# EAGLE board au7860_9_teardown (EAGLE 7.6.0)
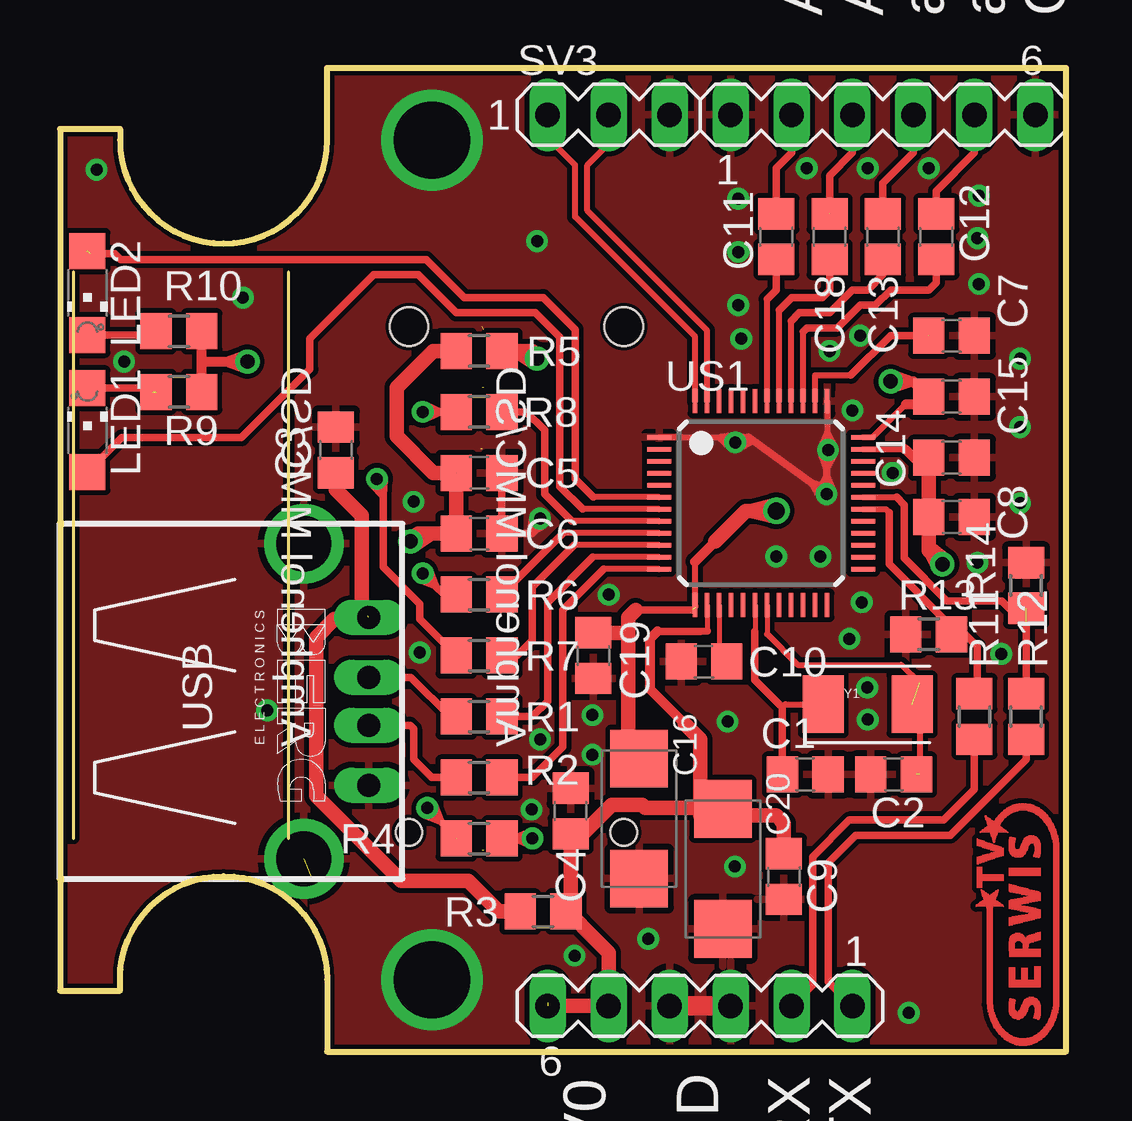
[diagram p0: board, top side]
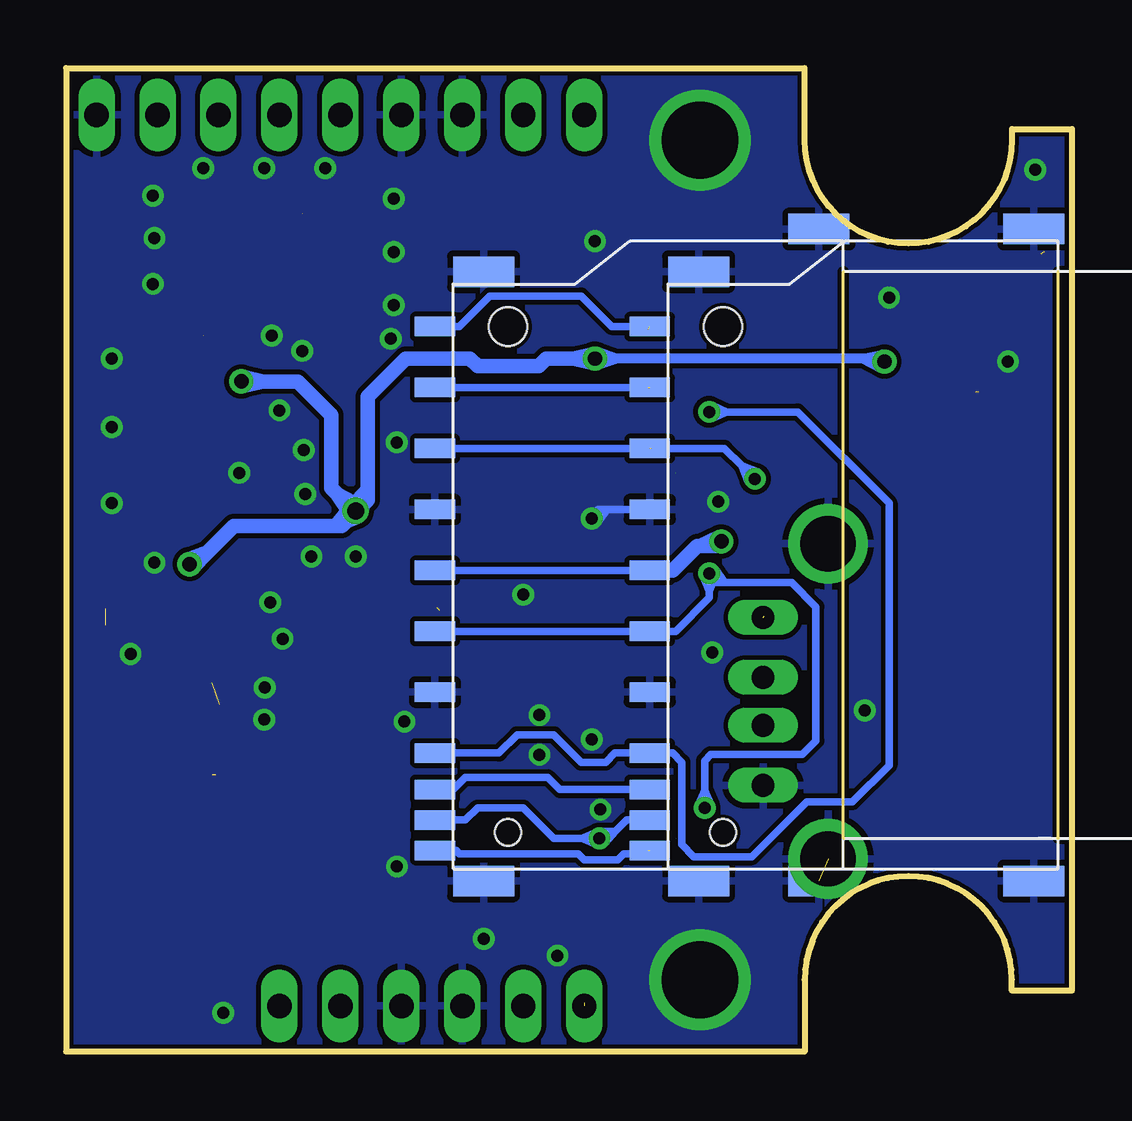
[diagram p1: board, bottom side, seen from below]

Size 41.91 x 41 mm. Coordinates in mm from the lower left corner, seen from the top.
Outline: 2.5,38 2.5,38.46 0,38.46 0,2.54 2.5,2.54 2.5,3
Outline: 2.5,38 arc180 11.13,38
Outline: 2.5,3 arc-180 11.13,3
Outline: 2.5,38 arc180 11.13,38
Outline: 11.13,38 11.13,41 41.91,41 41.91,0 11.13,0 11.13,3
Outline: 2.5,3 arc-180 11.13,3
Copper layers (1*16): Top 0.035mm / dielectric 1.5mm / Bottom 0.035mm
Design rules "default": minimum track width 0mil, minimum drill 22mil, track to track 8mil, track to pad 8mil, pad to pad 8mil, via to via 8mil, smd to smd 8mil, copper to edge 7mil, drill to drill 8mil, minimum pad ring 10mil, minimum via ring 8mil, stop-mask expansion 4mil, vias tented up to drill 23mil, thermal gap 10mil

## Footprints (pad centres in the part's own frame; a part is rotated, then mirrored left to right if it is on the bottom)
C0805 = smd 1.3 x 1.5: 1 -0.95,0; 2 0.95,0
SMC_C = smd 2.4 x 2.4: + -2.5,0; - 2.5,0
CHIPLED_1206 = smd 1.5 x 1.5: A 0,-1.75; C 0,1.75
R0805 = smd 1.3 x 1.5: 1 -0.95,0; 2 0.95,0
MA06-1 = drill 1.016 long: 1 -6.35,0; 2 -3.81,0; 3 -1.27,0; 4 1.27,0; 5 3.81,0; 6 6.35,0
MA03-1 = drill 1.016 long: 1 -2.54,0; 2 0,0; 3 2.54,0
SDCMF-10915W010 = smd 0.813 x 1.676: 1 7.366,13.462; 2 4.826,13.462; 3 2.286,13.462; 4 -0.254,13.462; 5 -2.794,13.462; 6 -5.334,13.462; 7 -7.874,13.462; 8 -9.398,13.462; 9 9.906,13.462; 10 -11.938,13.462; 11 -10.668,13.462 | smd 1.27 x 2.54: 12 12.192,11.43; 13 13.97,-2.54; 14 -13.208,-2.54; 15 -13.208,11.43 | hole 1.6: 9.906,10.414 | hole 1.1: -11.176,10.414
LQFP48-7X7 = smd 1 x 0.2: 1 -4.25,2.75; 2 -4.25,2.25; 3 -4.25,1.75; 4 -4.25,1.25; 5 -4.25,0.75; 6 -4.25,0.25; 7 -4.25,-0.25; 8 -4.25,-0.75; 9 -4.25,-1.25; 10 -4.25,-1.75; 11 -4.25,-2.25; 12 -4.25,-2.75; 25 4.25,-2.75; 26 4.25,-2.25; 27 4.25,-1.75; 28 4.25,-1.25; 29 4.25,-0.75; 30 4.25,-0.25; 31 4.25,0.25; 32 4.25,0.75; 33 4.25,1.25; 34 4.25,1.75; 35 4.25,2.25; 36 4.25,2.75 | smd 0.2 x 1: 13 -2.75,-4.25; 14 -2.25,-4.25; 15 -1.75,-4.25; 16 -1.25,-4.25; 17 -0.75,-4.25; 18 -0.25,-4.25; 19 0.25,-4.25; 20 0.75,-4.25; 21 1.25,-4.25; 22 1.75,-4.25; 23 2.25,-4.25; 24 2.75,-4.25; 37 2.75,4.25; 38 2.25,4.25; 39 1.75,4.25; 40 1.25,4.25; 41 0.75,4.25; 42 0.25,4.25; 43 -0.25,4.25; 44 -0.75,4.25; 45 -1.25,4.25; 46 -1.75,4.25; 47 -2.25,4.25; 48 -2.75,4.25
PN87520-S = drill 0.95 long: 1 -3.5,2.71; 2 -1,2.71; 3 1,2.71; 4 3.5,2.71 | drill 2.3 pad 2.9: S1 -6.57,0; S2 6.57,0
CRYSTAL-TXC-7A = smd 1.7 x 2.4: P$1 1.85,0; P$2 -1.85,0

## Placement (x,y rotation side)
C1  22p  [C0805]  31.05,11.56 180 top
C2  22p  [C0805]  34.73,11.56 0 top
C3  10u  [C0805]  11.49,25.08 90 top
C4  10u  [C0805]  21.27,10.03 90 top
C5  10u  [C0805]  17.46,24.13 0 top
C6  10u  [C0805]  17.46,21.59 0 top
C7  10u  [C0805]  37.15,29.84 0 top
C8  10u  [C0805]  37.15,22.29 0 top
C9  10u  [C0805]  30.16,7.3 270 top
C10  10u  [C0805]  26.83,16.26 180 top
C11  10u  [C0805]  29.84,33.97 270 top
C12  10u  [C0805]  36.51,33.97 270 top
C13  10u  [C0805]  34.29,33.97 270 top
C14  10u  [C0805]  37.15,24.77 0 top
C15  10u  [C0805]  37.15,27.3 0 top
C16  100u/6V niobowy  [SMC_C]  24.13,9.72 270 top
C18  10u  [C0805]  32.07,33.97 270 top
C19  10u  [C0805]  22.23,16.51 270 top
C20  100u/6V niobowy  [SMC_C]  27.62,7.62 270 top
LED1  Zielona  [CHIPLED_1206]  1.14,25.91 0 top
LED2  Czerwona  [CHIPLED_1206]  1.14,31.62 180 top
R1  100  [R0805]  17.46,13.97 0 top
R2  100  [R0805]  17.46,11.43 0 top
R3  1  [R0805]  20.13,5.84 0 top
R4  10k  [R0805]  17.46,8.89 180 top
R5  1  [R0805]  17.46,29.21 0 top
R6  100  [R0805]  17.46,19.05 0 top
R7  100  [R0805]  17.46,16.51 0 top
R8  100  [R0805]  17.46,26.67 0 top
R9  470  [R0805]  4.95,27.5 0 top
R10  470  [R0805]  4.95,30.04 0 top
R11  1  [R0805]  38.1,13.97 90 top
R12  1  [R0805]  40.26,13.97 90 top
R13  nie montowac  [R0805]  36.2,17.4 0 top
R14  nie montowac  [R0805]  40.26,19.43 90 top
SV1  Nie montowac  [MA06-1]  34.29,39.05 0 top
SV2  Nie montowac  [MA06-1]  26.67,1.91 180 top
SV3  [MA03-1]  22.86,39.05 0 top
U$1  Nie montować  [SDCMF-10915W010]  4.13,20.32 90 bottom
U$2  Nie montować  [SDCMF-10915W010]  13.08,20.32 90 bottom
US1  AU7860  [LQFP48-7X7]  29.21,22.86 0 top
USB  Nie montowac  [PN87520-S]  10.16,14.61 270 top
Y1  QSDG12M000-SJK 12MHz www.maritex.com.pl  [CRYSTAL-TXC-7A]  33.66,14.48 0 top

## Library data of the parts
C1-C16 C18-C20 R1-R14 = rcl
LED1 LED2 = led
SV1-SV3 = con-lstb; OC_FARNELL: unknown; OC_NEWARK: unknown
U$1 U$2 = kingfont_sdcmf10915w010_covek
US1 = st-microelectronics
USB = con-berg; OC_FARNELL: unknown; OC_NEWARK: unknown
Y1 = SparkFun-FreqCtrl

## Nets
+3V3: C8.1 C14.1 C15.1 C16.+ C19.1 R5.2 R9.2 R10.2 US1.13 US1.35 US1.36
+5V: C4.1 C9.1 C20.+ R3.2 SV2.5 SV2.6 US1.14
GND: C1.1 C2.1 C3.2 C4.2 C5.2 C6.2 C7.2 C8.2 C9.2 C10.2 C14.2 C15.2 C16.- C19.2 C20.- R13.1 R14.2 SV1.1 SV1.6 SV2.3 SV2.4 SV3.3 U$1.3 U$1.6 U$1.12 U$1.13 U$1.14 U$1.15 U$2.3 U$2.6 U$2.12 U$2.13 U$2.14 U$2.15 US1.1 US1.37 USB.4 USB.S1 USB.S2
N$1: C1.2 US1.18 Y1.P$2
N$2: C2.2 US1.19 Y1.P$1
N$3: R7.1 U$1.2 U$2.2
N$4: C13.2 US1.40
N$5: C12.2 US1.39
N$6: LED2.C R10.1
N$7: LED1.C R9.1
N$8: C7.1 US1.38
N$9: C13.1 SV1.4
N$10: C10.1 US1.15
N$11: C12.1 SV1.5
N$12: R4.1 U$1.11 U$2.11
N$13: R4.2 R6.1 U$1.5 U$2.5
N$14: R8.1 U$1.7 U$2.7
N$15: R11.1 SV2.2
N$16: C5.1 C6.1 R5.1 U$1.4 U$2.4
N$17: C18.2 US1.41
N$18: R11.2 R13.2 US1.30
N$19: R8.2 US1.8
N$20: R7.2 US1.10
N$21: R6.2 US1.9
N$22: R12.1 SV2.1
N$23: C3.1 R3.1 USB.1
N$24: R1.1 USB.2
N$25: R2.1 USB.3
N$26: R12.2 R14.1 US1.31
N$27: R1.2 US1.11
N$28: R2.2 US1.12
N$29: SV3.2 US1.47
N$30: SV3.1 US1.48
N$35: C11.2 US1.42
N$36: C11.1 SV1.2
N$37: C18.1 SV1.3
N$38: LED2.A US1.6
N$39: LED1.A US1.7
N$40: U$1.8 U$2.8
N$41: U$1.9 U$2.9
N$42: U$1.1 U$2.1
N$43: U$1.10 U$2.10

## Tracks (layer width: path | path; a pad name or v marks a point on that pad's centre or on a via)
+3V3  (via drill 0.6, 0.7)  (1 unrouted)
  Top 0.203: 36.2,23.81 36.2,24.13 | 35.88,27.3 C15.1
  Top 0.254: 26.46,20.43 US1.13 26.46,18.52 | US1.35 35.22,25.11 | 35.24,26.99 33.87,25.61 US1.36
  Top 0.305: 36.2,23.81 36.2,22.86 36.2,21.91 C8.1 | 35.88,27.3 35.88,27.62 36.2,27.62 | C15.1 35.88,26.98 35.88,26.99 | 26.35,18.41 24,18.41 | 22.55,17.46 C19.1
  Top 0.406: 26.46,20.43 27.3,21.27 | 35.22,25.11 36.2,24.13 | R9.2 5.9,28.77 | 5.9,28.77 R10.2 | 5.9,28.77 6.91,28.77 | 6.91,28.77 v7.81,28.77 | 35.88,27.62 35.56,27.94 35.51,27.94 | 35.51,27.94 v34.61,27.94 | 35.24,26.99 35.88,26.99 | 23.68,13.02 24.13,12.7 C16.+ | 6.91,28.77 7.71,28.48 v7.81,28.77 | 6.91,28.77 7.71,29.05 v7.81,28.77 | 35.51,27.94 34.71,28.22 v34.61,27.94 | 35.51,27.94 34.71,27.66 v34.61,27.94
  Top 0.61: R5.2 19.03,29.21 | 19.03,29.21 19.68,29.21 v19.88,28.89 | C14.1 36.2,23.81 36.2,21.02 | 36.2,21.02 36.2,20.89 v36.77,20.32 | 23.68,17.46 23.68,18.1 24,18.41 | 23.68,17.46 23.68,13.02 | 22.54,17.46 22.55,17.46 23.68,17.46 | v29.84,22.54 28.8,22.54 | 28.8,22.54 28.57,22.54 27.3,21.27 | 28.8,22.54 29.79,22.3 v29.84,22.54 | 28.8,22.54 29.79,22.78 v29.84,22.54 | 19.03,29.21 19.77,28.73 v19.88,28.89 | 19.03,29.21 19.9,29.09 v19.88,28.89 | 36.2,21.02 36.59,20.23 v36.77,20.32 | 36.2,21.02 36.89,20.48 v36.77,20.32
  Bottom 0.406: 8.7,28.89 8.06,28.89 7.87,28.7 | 8.7,28.89 18.98,28.89 | 18.98,28.89 v19.88,28.89 | 8.7,28.89 7.87,29.06 v7.81,28.77 7.95,28.5 8.7,28.89 | 18.98,28.89 19.77,28.61 v19.88,28.89 | 18.98,28.89 19.77,29.18 v19.88,28.89
  Bottom 0.61: 20.78,28.89 21.91,28.89 22.23,28.57 24.77,28.57 25.08,28.89 27.75,28.89 29.34,27.3 29.34,23.46 | 20.78,28.89 v19.88,28.89 | 33.71,27.94 32.26,27.94 30.86,26.54 30.86,23.5 30.62,23.25 | 33.71,27.94 v34.61,27.94 | v36.77,20.32 36.51,20.32 36.02,20.82 | 36.02,20.82 34.93,21.91 30.68,21.91 | 30.68,21.91 30.42,21.91 29.84,22.48 | 30.62,23.25 29.84,22.48 | 29.34,23.46 29.34,22.99 29.84,22.48 | 30.68,21.91 30.04,22.7 v29.84,22.54 | 30.68,21.91 29.75,22.32 v29.84,22.54 | 30.62,23.25 29.73,22.76 v29.84,22.54 | 30.62,23.25 30.05,22.4 v29.84,22.54 | 29.34,23.46 29.61,22.48 v29.84,22.54 | 29.34,23.46 30.03,22.71 v29.84,22.54 | 20.78,28.89 19.92,29.09 v19.88,28.89 | 20.78,28.89 19.92,28.7 v19.88,28.89 | 36.02,20.82 36.62,20.18 v36.77,20.32 | 36.02,20.82 36.84,20.5 v36.77,20.32 | 33.71,27.94 34.56,27.75 v34.61,27.94 | 33.71,27.94 34.56,28.13 v34.61,27.94
+5V  (1 unrouted)
  Top 0.203: US1.14 26.96,17.54
  Top 0.305: 26.96,17.54 26.67,17.53 24.89,17.53
  Top 0.406: 24.89,17.53 24.57,17.21 24.57,15.11 26.04,13.65 | 26.67,9.84 27.69,9.84 27.69,10.12 | C20.+ 27.69,10.12 | 27.69,10.12 27.69,10.16
  Top 0.61: 20,1.91 SV2.6 SV2.5 22.86,4.13 22.22,4.76 21.27,5.71 | 21.27,5.71 C4.1 21.78,9.08 22.99,10.29 24.26,10.29 24.38,10.16 27.58,10.16 C20.+ | C9.1 30.16,9.53 29.84,9.84 26.67,9.84 26.67,13.02 26.04,13.65 | 20.19,2.16 20.32,2.03 | 21.27,5.71 20.83,6.16 20.83,6.22 R3.2
GND  (via drill 0.5, 3.2)  (1 unrouted)
  Top 0.254: US1.37 31.96,25.83 | 31.96,25.83 31.96,24.66 | US1.1 27.41,25.61 | 27.41,25.61 28.68,25.61 | 31.96,25.83 31.7,25.21 v32,25.08 32.29,25.24 31.96,25.83 | 27.41,25.61 27.91,25.16 v28.13,25.4 28.08,25.72 27.41,25.61
  Top 0.305: C5.2 C6.2 19.6,21.59 | v20,22.23 20,21.91 19.68,21.59 19.6,21.59 | 31.96,24.66 31.96,24.33 | 31.96,24.33 v31.94,23.24 | 28.68,25.61 v31.94,23.24 | 19.6,21.59 20.17,21.98 v20,22.23 | 19.6,21.59 19.7,22.27 v20,22.23 | v31.94,23.24 31.67,23.36 31.95,23.99 32.22,23.36 v31.94,23.24 | v31.94,23.24 31.68,23.09 31.33,23.68 32.01,23.54 v31.94,23.24 | 31.96,24.33 32.27,24.94 v32,25.08 31.72,24.98 31.96,24.33 | 28.88,25.47 28.23,25.68 v28.13,25.4 28.28,25.14 28.88,25.47
  Top 0.813: SV2.3 SV2.4
  Bottom 0.305: U$1.3 19.36,22.61 | 19.36,22.61 19.75,22.61 v20,22.23 | 19.36,22.61 19.76,22.05 v20,22.23 | 19.36,22.61 20.04,22.52 v20,22.23
  other vias: 36.2,36.83 33.66,36.83 31.11,36.83 32.89,17.21 15.5,3 15.5,38 32.07,29.21 33.34,29.84 28.26,35.56 28.26,33.34 34.69,24.13 14.73,22.92 19.88,33.78 24.51,4.7 31.69,20.64 38.23,33.91 2.67,28.77 40.01,28.89 40.01,26.04 40.01,22.86 33.02,26.73 14.99,16.64 29.84,20.64 33.66,13.84 20,13.02 38.29,35.69 28.26,31.11 38.29,32 22.86,19.05 28.12,7.72 39.22,16.57 21.44,4 22.19,14.03 27.81,13.76 7.62,31.43 38.23,20.38 8.64,14.22 1.52,36.77 33.64,15.18 22.19,12.38 19.65,10.09 35.36,1.62 33.4,18.73 28.38,29.72
  pour Bottom: -1.27,41.91 43.18,41.91 43.18,-1.27 -1.27,-1.27
  pour Top: -1.27,41.91 43.18,41.91 43.18,-1.27 -1.27,-1.27
N$1
  Top 0.203: US1.18 28.96,17.53
  Top 0.254: 30.1,14.35 30.23,14.48 Y1.P$2
  Top 0.305: C1.2 30.1,14.35 29.84,14.61 28.96,15.49 28.96,17.53
N$2  (2 unrouted)
  Top 0.203: US1.19 29.46,17.4
  Top 0.254: 29.46,17.4 30.73,16.13 35.05,16.13 35.81,15.37 35.81,11.56
N$3  (via drill 0.5)  (1 unrouted)
  Top 0.305: R7.1 14.99,18.04 14.99,18.67 13.46,20.19 13.46,23.17 | 13.46,23.17 13.46,23.24 13.21,23.5 v13.21,23.88 | 13.46,23.17 13.51,23.86 v13.21,23.88 | 13.46,23.17 12.99,23.67 v13.21,23.88
  Bottom 0.305: v13.21,23.88 13.74,24.41 | 13.74,24.41 14.48,25.15 17.53,25.15 | U$2.2 U$1.2 | 13.74,24.41 13.1,24.16 v13.21,23.88 | 13.74,24.41 13.49,23.77 v13.21,23.88
N$4
  Top 0.254: US1.40 30.46,30.46
  Top 0.305: 30.46,30.46 30.8,30.8 32.07,30.8 33.02,31.75 33.66,31.75 34.29,32.38 C13.2
N$5
  Top 0.254: US1.39 30.96,30.01
  Top 0.305: 30.96,30.01 31.11,30.16 32.38,30.16 33.34,31.11 33.97,31.11 34.61,31.75 36.2,31.75 36.51,32.07 C12.2
N$6
  Top 0.305: LED2.C 4.48,29.87 R10.1
N$7  (1 unrouted)
  Top 0.305: LED1.C 3.52,27.66 3.68,27.5 3.87,27.5
N$8  (1 unrouted)
  Top 0.254: US1.38 31.46,28.19 32.96,28.19
  Top 0.305: 32.96,28.19 34.61,29.84 C7.1
N$9
  Top 0.305: SV1.4 35.56,37.47 34.29,36.2 C13.1
N$10
  Top 0.203: US1.15 27.46,16.51
  Top 0.305: 27.46,16.51 C10.1
N$11
  Top 0.305: SV1.5 38.1,37.47 36.51,35.88 C12.1
N$12  (via drill 0.5)
  Top 0.305: R4.1 18.93,8.89 | 18.93,8.89 v19.68,8.89 | 18.93,8.89 19.56,8.61 v19.68,8.89 | 18.93,8.89 19.56,9.17 v19.68,8.89
  Bottom 0.305: U$1.11 18.54,9.65 19,9.19 | 19,9.19 19.56,8.64 v19.68,8.89 | U$2.11 25.27,9.65 24.77,10.16 22.86,10.16 21.59,8.89 20.43,8.89 | 20.43,8.89 19.94,8.89 19.68,8.64 | 19,9.19 19.46,8.69 v19.68,8.89 | 19,9.19 19.69,9.19 v19.68,8.89 | 20.43,8.89 19.81,9.17 v19.68,8.89 | 20.43,8.89 19.81,8.61 v19.68,8.89
N$13  (via drill 0.5)  (1 unrouted)
  Top 0.305: v15.3,10.16 15.83,9.63 | 15.83,9.63 16.57,8.89 R4.2 | R6.1 16,19.05 15.64,19.41 | 15.64,19.41 v15.11,19.94 | 15.83,9.63 15.58,10.27 v15.3,10.16 | 15.83,9.63 15.19,9.88 v15.3,10.16 | 15.64,19.41 15.39,20.05 v15.11,19.94 | 15.64,19.41 15,19.66 v15.11,19.94
  Bottom 0.305: v15.3,10.16 15.3,10.91 | 15.3,10.91 15.3,12.13 15.05,12.38 11.24,12.38 10.67,12.95 10.67,18.54 11.68,19.56 14.47,19.56 | 14.47,19.56 14.99,19.56 v15.11,19.94 | v15.11,19.94 15.11,19.19 | 15.11,19.19 15.11,18.92 16.51,17.53 U$1.5 U$2.5 | 15.3,10.91 15.03,10.28 v15.3,10.16 | 15.3,10.91 15.58,10.28 v15.3,10.16 | 14.47,19.56 15.15,19.64 v15.11,19.94 | 14.47,19.56 14.87,20.11 v15.11,19.94 | 15.11,19.19 15.39,19.82 v15.11,19.94 | 15.11,19.19 14.84,19.82 v15.11,19.94
N$14  (via drill 0.5)
  Top 0.305: R8.1 15.86,26.67 | 15.86,26.67 v15.11,26.67 | 15.86,26.67 15.23,26.95 v15.11,26.67 | 15.86,26.67 15.23,26.39 v15.11,26.67
  Bottom 0.305: U$2.7 23.88,12.45 23.11,13.21 21.59,13.21 20.45,12.06 19.43,12.06 19.05,12.45 U$1.7 16.64,12.45 16.26,12.06 16.26,8.64 15.75,8.13 13.34,8.13 11.05,10.41 9.14,10.41 7.62,11.94 7.62,22.86 11.43,26.67 14.36,26.67 | v15.11,26.67 14.36,26.67 | 14.36,26.67 14.99,26.39 v15.11,26.67 | 14.36,26.67 14.99,26.95 v15.11,26.67
N$15
  Top 0.305: SV2.2 31.37,2.79 31.37,8.13 32.89,9.65 36.83,9.65 38.1,10.92 R11.1
N$16  (via drill 0.6)  (1 unrouted)
  Top 0.305: C6.1
  Top 0.61: v14.61,21.27 14.92,21.59 15.45,21.59 | 15.45,21.59 C6.1 | R5.1 15.56,29.21 14.03,27.69 14.03,25.65 15.56,24.13 C5.1 | C5.1 C6.1 | 15.45,21.59 14.58,21.47 v14.61,21.27 | 15.45,21.59 14.71,21.11 v14.61,21.27
  Bottom 0.305: U$2.4 U$1.4 17.53,20.07
  Bottom 0.61: v14.61,21.27 14.8,21.27 14.99,21.08 15.48,21.08 | 15.48,21.08 15.62,21.08 16.64,20.07 17.53,20.07 | 15.48,21.08 14.69,21.45 v14.61,21.27 | 15.48,21.08 14.61,21.07 v14.61,21.27
N$17
  Top 0.254: US1.41 29.96,30.91
  Top 0.305: 29.96,30.91 30.48,31.43 31.75,31.43 32.07,31.75 C18.2
N$18
  Top 0.203: 36.96,17.91 36.89,17.65 R13.2
  Top 0.254: US1.30 34.41,22.61 34.54,22.48
  Top 0.305: 34.54,22.48 34.54,20.32 36.96,17.91 | R13.2 37.72,17.4 38.23,16.89 38.23,15.05 R11.2
N$19
  Top 0.254: US1.8 21.32,22.11
  Top 0.305: R8.2 19.43,26.67 20.19,25.91 20.19,23.24 21.32,22.11
N$20
  Top 0.254: US1.10 21.43,21.11
  Top 0.305: 21.43,21.11 19.68,19.37 19.68,17.14 19.05,16.51 R7.2
N$21
  Top 0.254: US1.9 20.98,21.61
  Top 0.305: 18.43,19.07 R6.2 20.98,21.61
N$22
  Top 0.305: SV2.1 32,2.92 32,7.87 33.15,9.02 37.08,9.02 40.26,12.19 R12.1
N$23  (1 unrouted)
  Top 0.61: USB.1 12.8,18.03 11.43,18.03 10.67,17.27 10.67,10.67 14.22,7.11 17.02,7.11 18.29,5.84 R3.1 19.3,6.22 | C3.1 11.49,23.43 12.57,22.35 12.57,18.41 12.83,18.16
N$24
  Top 0.305: R1.1 16.26,13.97 14.62,15.61 USB.2
N$25
  Top 0.305: USB.3 14.59,13.61 14.73,13.46 14.73,12.19 15.49,11.43 R2.1
N$26  (1 unrouted)
  Top 0.254: US1.31 34.87,23.11
  Top 0.305: 34.87,23.11 35.18,22.8 35.18,20.57 36.96,18.8 39.24,18.8 40.26,17.78 R12.2
N$27
  Top 0.254: US1.11 22.2,20.61
  Top 0.305: 22.2,20.61 20.32,18.73 20.32,14.61 19.68,13.97 R1.2
N$28
  Top 0.254: US1.12 22.65,20.11
  Top 0.305: 22.65,20.11 20.95,18.41 20.95,12.7 19.68,11.43 R2.2
N$29
  Top 0.254: US1.47 26.96,30.06 21.97,35.05 21.97,36.96 22.86,37.85 SV3.2
N$30
  Top 0.254: US1.48 26.46,29.8 21.46,34.8 21.46,36.96 20.32,38.1 SV3.1
N$35
  Top 0.254: US1.42 29.46,31.36
  Top 0.305: 29.46,31.36 29.84,31.75 C11.2
N$36
  Top 0.305: SV1.2 30.48,37.47 29.84,36.83 C11.1
N$37  (1 unrouted)
  Top 0.305: SV1.3 33.02,37.47 32.07,36.51 C18.1 | 32.38,35.24 C18.1
N$38  (1 unrouted)
  Top 0.254: US1.6 22.23,23.11
  Top 0.305: 22.23,23.11 21.46,23.88 21.46,30.1 20.13,31.43 16.84,31.43 15.25,33.02 2.54,33.02 2.29,33.27 1.27,33.27
N$39
  Top 0.254: US1.7 21.78,22.61
  Top 0.305: LED1.A 2.58,25.59 7.56,25.59 10.41,28.45 10.41,29.72 13.08,32.38 14.92,32.38 16.51,30.8 19.81,30.8 20.83,29.78 20.83,23.56 21.78,22.61
N$40
  Bottom 0.305: U$2.8 25.78,10.92 25.27,11.43 21.84,11.43 21.34,10.92 U$1.8
N$41  (1 unrouted)
  Bottom 0.305: U$2.9 25.53,30.23 24.26,31.5 20.45,31.5 19.18,30.23 17.78,30.23 17.65,30.1
N$42  (1 unrouted)
  Bottom 0.305: U$2.1 17.65,27.69
N$43  (1 unrouted)
  Bottom 0.305: U$2.10 25.65,8.38 25.53,8.26 20.57,8.26 20.32,8 18.92,8 18.67,8.26 17.78,8.26 17.65,8.38 17.65,8.26
(copper drawn outside any net)
  shapes: Top area x895

## Text on the board
tPlace: AUX left channel in - connect to GND | AUX right channel in - connect to GND | audio left channel output | audio right channel output | GND | 5V0 | GND | RX | TX
tStop: MP3 | v.1.3